# EAGLE board CANSAT (EAGLE 9.5.1)
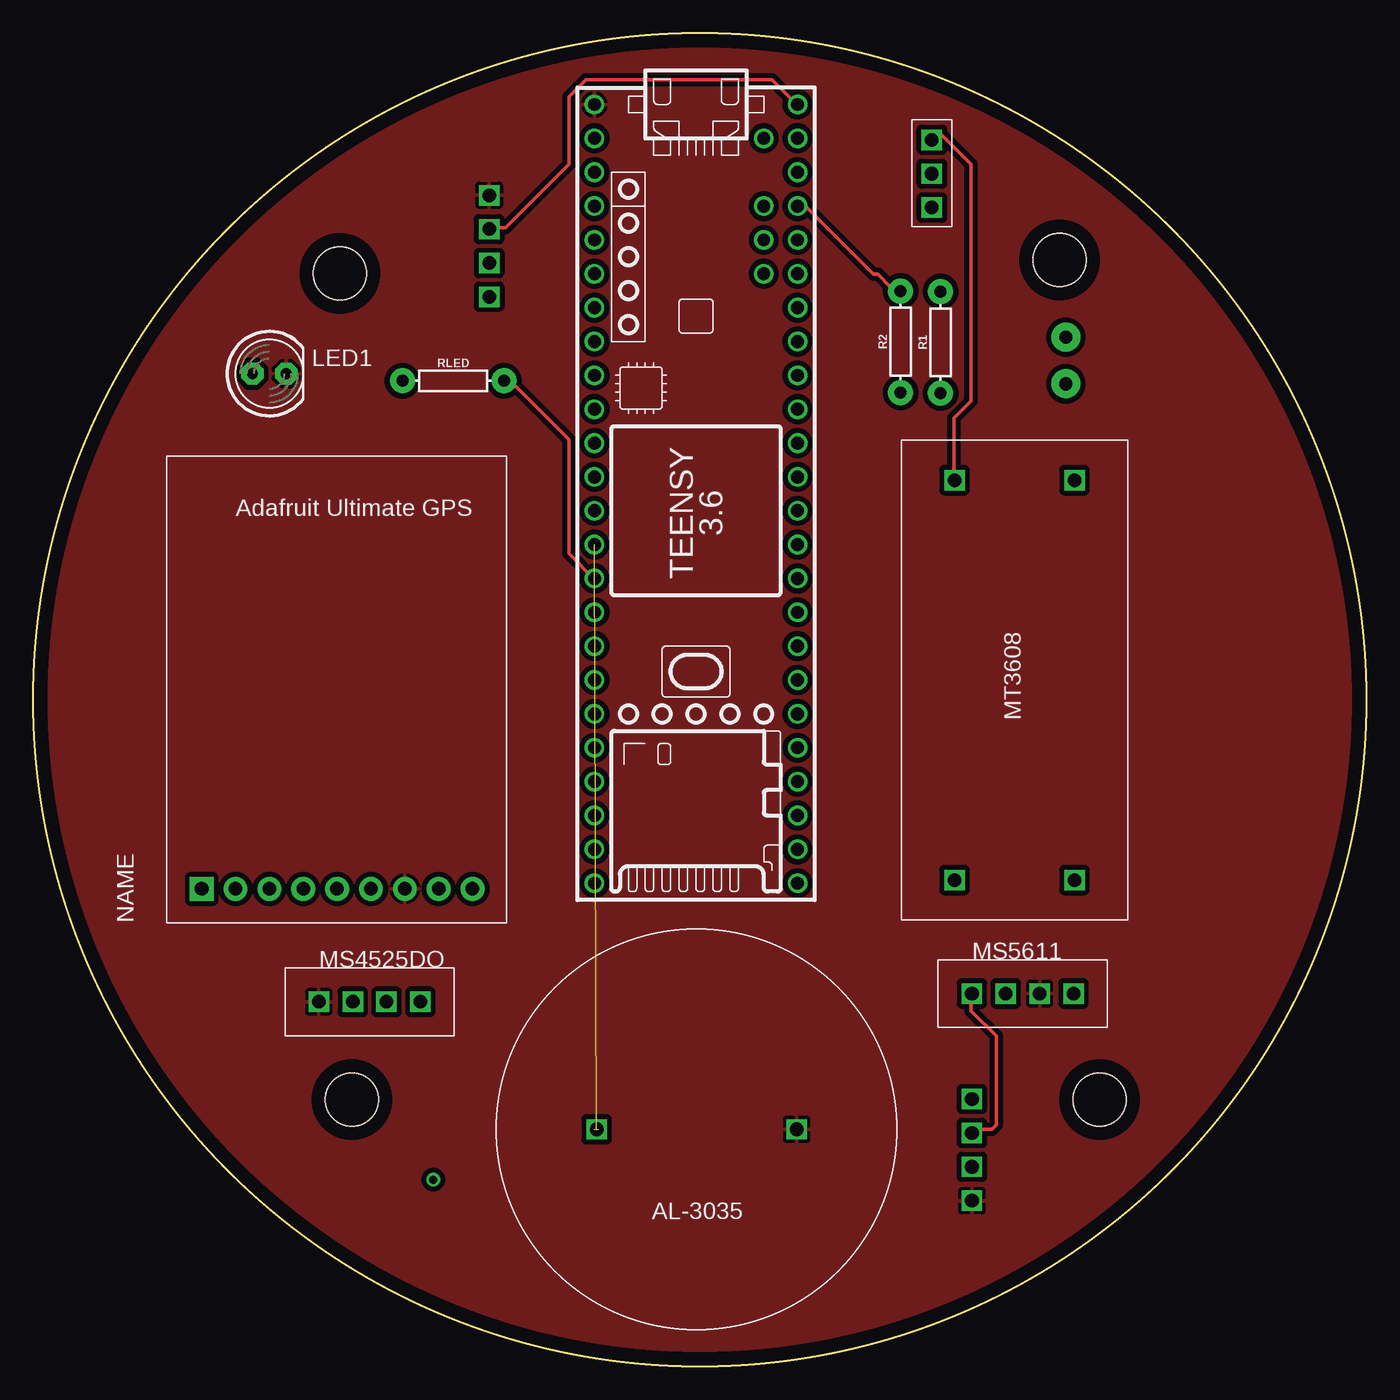
[diagram p0: board, top side]
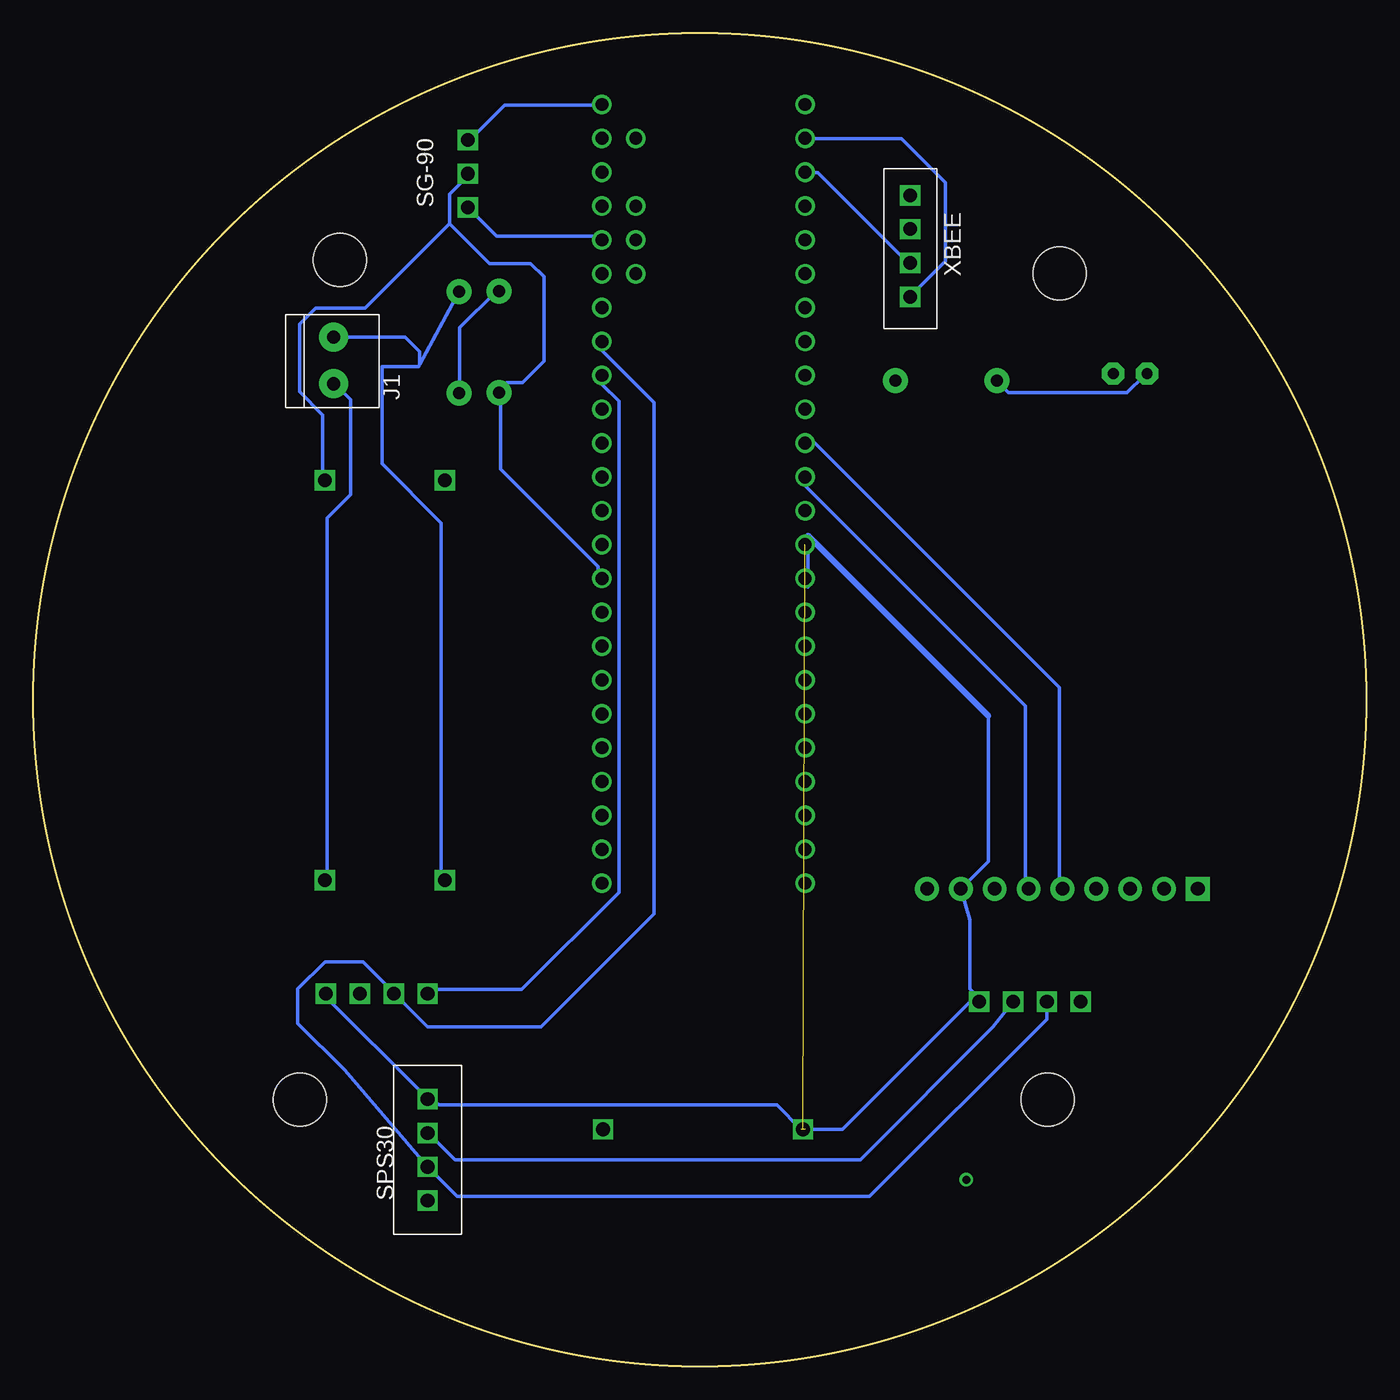
[diagram p1: board, bottom side, seen from below]

Size 100 x 100 mm. Coordinates in mm from the lower left corner, seen from the top.
Outline: circle at 50,50 radius 50
Copper layers (1*16): Top 0.035mm / dielectric 1.5mm / Bottom 0.035mm
Design rules "default": minimum track width 6mil, minimum drill 0.35mm, track to track 6mil, track to pad 6mil, pad to pad 6mil, via to via 6mil, smd to smd 6mil, copper to edge 40mil, drill to drill 6mil, minimum pad ring 10mil, minimum via ring 8mil, stop-mask expansion 4mil, vias tented up to drill 0mil, thermal gap 10mil
Net classes: 0 default: width 0.254 mm, drill 0.508 mm, clearance 0.381 mm
Holes 4 mm at 80,20 23.9,20 77,83 23,82

## Footprints (pad centres in the part's own frame; a part is rotated, then mirrored left to right if it is on the bottom)
ADAFRUITGPS = drill 1.016 pad 1.778 square: 3.3V -22.86,2.54 | drill 1.016 pad 1.778: EN -20.32,2.54; FIX -15.24,2.54; GND -7.62,2.54; PPS -2.54,2.54; RX -10.16,2.54; TX -12.7,2.54; VBAT -17.78,2.54; VIN -5.08,2.54
1X2-3.5MM = drill 1 pad 2.184: 1 1.8,0; 2 -1.7,0
LED5MM = drill 0.813 pad 1.676 octagon: A -1.27,0; K 1.27,0
AXIAL-0.3 = drill 0.9 pad 1.88: P$1 -3.81,0; P$2 3.81,0
MT3608 = drill 1.02 square: VIN+ 3,13; VIN- 3,4; VOUT+ 33,13; VOUT- 33,4
TEENSY_3.5/3.6_BASIC = drill 0.965: 0/RX -25.4,-7.62; 1/TX -22.86,-7.62; 2 -20.32,-7.62; 3/CANTX -17.78,-7.62; 3V3 7.62,-7.62; 3V3_LO -22.86,7.62; 4/CANRX -15.24,-7.62; 5 -12.7,-7.62; 6 -10.16,-7.62; 7 -7.62,-7.62; 8 -5.08,-7.62; 9/CS -2.54,-7.62; 10/CS 0,-7.62; 11/MOSI 2.54,-7.62; 12/MISO 5.08,-7.62; 13/SCK 5.08,7.62; 14/A0 2.54,7.62; 15/A1 0,7.62; 16/A2 -2.54,7.62; 17/A3 -5.08,7.62; 18/A4/SDA -7.62,7.62; 19/A5/SCL -10.16,7.62; 20/A6 -12.7,7.62; 21/A7 -15.24,7.62; 21/DAC0 12.7,7.62; 22/A8 -17.78,7.62; 23/A9 -20.32,7.62; 24 10.16,-7.62; 25 12.7,-7.62; 26 15.24,-7.62; 27 17.78,-7.62; 28 20.32,-7.62; 29 22.86,-7.62; 30 25.4,-7.62; 31/A12 27.94,-7.62; 32/A13 30.48,-7.62; 33/A14 30.48,7.62; 34/A15 27.94,7.62; 35/A16 25.4,7.62; 36/A17 22.86,7.62; 37/A18 20.32,7.62; 38/A19 17.78,7.62; 39/A20 15.24,7.62; A10 -17.78,5.08; A11 -15.24,5.08; A22/DAC1 10.16,7.62; AGND -25.4,7.62; AREF -20.32,5.08; GND -27.94,-7.62; GND2 7.62,7.62; VIN -27.94,7.62; VUSB -25.4,5.08
XBEE-S2CPRO = drill 1.019 square: 5V 0,2.54; GND 0,0; RX 0,5.08; TX 0,7.62
MS4525DO = drill 1.02 square: GND 0,-7.62; SCL 0,-5.08; SDA 0,-2.54; VCC 0,0
MS5611 = drill 1.02 square: GND 0,-2.54; SCL 0,-5.08; SDA 0,-7.62; VCC 0,0
SPS30 = drill 1.02 square: GND 0,-7.62; RX/SDA 0,-2.54; TX/SCL 0,-5.08; VDD 0,0
BUZZER = drill 1.02 square: + 0,7.5; - 0,-7.5
SG-90 = drill 1.019 square: + 0,0; DATA 0,-5.08; GND 0,-2.54

## Placement (x,y rotation side)
GPS1  [ADAFRUITGPS]  35.49,33.27 0 top
J1  1X2-3.5MM  [1X2-3.5MM]  77.47,75.51 270 bottom
LED1  [LED5MM]  17.71,74.47 0 top
R1  1.2K  [AXIAL-0.3]  68.07,76.82 90 top
R2  2.5K  [AXIAL-0.3]  65.07,76.86 90 top
RLED  220  [AXIAL-0.3]  31.5,73.93 0 top
U$1  MT3608  [MT3608]  82.12,33.47 90 top
U$2  TEENSY_3.5/3.6_BASIC  [TEENSY_3.5/3.6_BASIC]  49.72,66.72 270 top
U$3  XBEE-S2CPRO  [XBEE-S2CPRO]  34.2,87.85 180 bottom
U$4  MS4525DO  [MS4525DO]  29.04,27.34 270 top
U$5  MS5611  [MS5611]  78.04,27.96 270 top
U$6  SPS30  [SPS30]  70.42,20.04 0 bottom
U$7  AL-3035  [BUZZER]  49.76,17.77 90 top
U$8  SG-90  [SG-90]  67.41,92.01 0 bottom

## Library data of the parts
GPS1 = AdafruitGPSbreakout
J1 LED1 = adafruit
R1 R2 RLED = SparkFun-Resistors
U$1 = MT3608
U$2 = JC_Teensy356
U$3 = XBEE-S2CPRO
U$4 = MS4525DO
U$5 = MS5611
U$6 = SPS30
U$7 = Al-3035
U$8 = SG90

## Nets
3V3: GPS1.VIN RLED.P$2 U$2.3V3 U$4.VCC U$5.VCC U$6.VDD
5V: U$1.VOUT+ U$2.VIN U$3.5V U$8.+
GND: GPS1.GND LED1.K U$2.GND U$3.GND U$4.GND U$5.GND U$6.GND U$7.-
GND2: R2.P$1 U$1.VOUT- U$2.GND2 U$8.GND
N$1: U$2.0/RX U$3.TX
N$2: LED1.A RLED.P$1
N$3: U$2.1/TX U$3.RX
N$4: J1.2 R1.P$2 U$1.VIN+
N$5: J1.1 U$1.VIN-
N$6: U$2.22/A8 U$8.DATA
N$7: U$2.12/MISO U$7.+
N$8: GPS1.TX U$2.9/CS
N$9: R1.P$1 R2.P$2 U$2.23/A9
N$10: GPS1.RX U$2.10/CS
SCL: U$2.19/A5/SCL U$4.SCL U$5.SCL U$6.TX/SCL
SDA: U$2.18/A4/SDA U$4.SDA U$5.SDA U$6.RX/SDA

## Tracks (layer width: path | path; a pad name or v marks a point on that pad's centre or on a via)
3V3  (1 unrouted)
  Top 0.254: RLED.P$2 35.42,73.66 36.05,73.66 40.18,69.53 40.18,60.96 42.09,59.05 U$2.3V3
  Bottom 0.254: 41.88,62.32 41.88,58.45 U$2.3V3 | 28.36,48.79 28.36,37.87 GPS1.VIN 29.74,33.49 29.74,28.29 29.07,27.62 U$4.VCC 29.73,27.34 39.29,17.78 42.09,17.78 | U$5.VCC 78.28,27.94 70.66,20.32 U$6.VDD 69.52,19.6 44.23,19.6 42.4,17.78
  Bottom 0.406: 28.36,48.79 41.88,62.32
5V
  Top 0.254: U$3.5V 34.47,85.41 35.42,85.41 40.18,90.17 40.18,95.25 41.45,96.52 55.42,96.52 57.33,94.61 U$2.VIN | U$1.VOUT+ 69.07,66.67 69.07,71.12 70.34,72.39 70.34,90.17 68.12,92.39 67.8,92.39 67.48,92.08 U$8.+
  Bottom 0.254: U$2.VIN 57.64,94.61 64.63,94.61 67.17,92.08 U$8.+
GND
  pour Top: -6.77,-2.92 -6.77,105 114,105 114,-2.92
GND2
  Bottom 0.254: U$2.GND2 57.64,59.37 57.64,60.01 64.94,67.31 64.94,73.03 R2.P$1 64.94,73.34 64.49,73.79 63.31,73.79 61.7,75.4 61.7,81.73 62.7,82.73 65.76,82.73 68.75,85.72 | 68.75,85.72 68.75,87.95 67.48,89.22 U$8.GND | 68.75,85.72 75.09,79.39 78.83,79.39 80.03,78.19 80.03,73.12 78.28,71.37 78.28,66.67 U$1.VOUT-
N$1
  Bottom 0.254: U$2.0/RX 42.09,92.08 34.85,92.08 31.58,88.8 31.58,82.9 34.15,80.33 U$3.TX
N$2
  Bottom 0.254: LED1.A 16.68,74.3 17.95,73.03 26.84,73.03 27.48,73.66 RLED.P$1
N$3
  Bottom 0.254: U$2.1/TX 42.09,89.53 41.13,89.53 34.47,82.87 U$3.RX
N$4
  Bottom 0.254: U$1.VIN+ 69.39,36.51 69.39,63.25 73.84,67.7 73.84,75 71.1,75 71.02,75.16 | 68.12,80.33 R1.P$2 71.02,75.16 | J1.2 72.11,77.21 71.02,76.12 71.02,75.16
N$5
  Bottom 0.254: U$1.VIN- 77.96,36.51 77.96,63.63 76.19,65.41 76.19,72.53 77.33,73.66 J1.1
N$6
  Bottom 0.254: U$2.22/A8 57.64,84.77 65.26,84.77 67.17,86.68 U$8.DATA
N$7  (1 unrouted)
N$8
  Bottom 0.254: U$2.9/CS 41.37,69.26 23.04,50.93 23.04,35.88 GPS1.TX
N$9
  Top 0.254: U$2.23/A9 57.64,87 57.96,87 63.04,81.92 63.36,81.92 64.31,80.96 64.94,80.96 R2.P$2
  Bottom 0.254: R1.P$1 68,73.01 68,77.91 65.26,80.64 R2.P$2
N$10
  Bottom 0.254: U$2.10/CS 42.09,66.67 42.09,66.04 25.57,49.53 25.57,35.88 GPS1.RX
N$14  (via drill 0.6)
  other vias: 30,14
SCL
  Bottom 0.254: U$2.19/A5/SCL 57.33,76.83 57.33,76.2 53.42,72.3 53.42,33.94 61.89,25.47 70.41,25.47 72.88,27.94 U$5.SCL 73.2,28.26 75.27,30.33 78.11,30.33 80.15,28.29 80.15,25.73 76.66,22.24 U$6.TX/SCL 68.2,12.74 37.25,12.74 23.96,26.03 U$4.SCL
SDA
  Top 0.254: U$6.RX/SDA 70.66,17.78 71.93,17.78 72.25,18.1 72.25,24.77 70.34,26.67 70.34,27.94 U$5.SDA
  Bottom 0.254: U$2.18/A4/SDA 57.33,74.3 57.33,73.66 56.05,72.39 56.05,35.56 63.36,28.26 70.34,28.26 U$5.SDA | U$4.SDA 27.99,25.44 37.94,15.49 68.37,15.49 70.34,17.46 U$6.RX/SDA